# Altium PCB PCB2.PcbDoc
Units mil, origin at the board's own origin, x right, y up, seen from the top; angles counter-clockwise.
Board outline 1210 x 745 mil, 2 copper layers (Top Layer, Bottom Layer); 14 components, 17 nets, 80 pads, 0 vias.
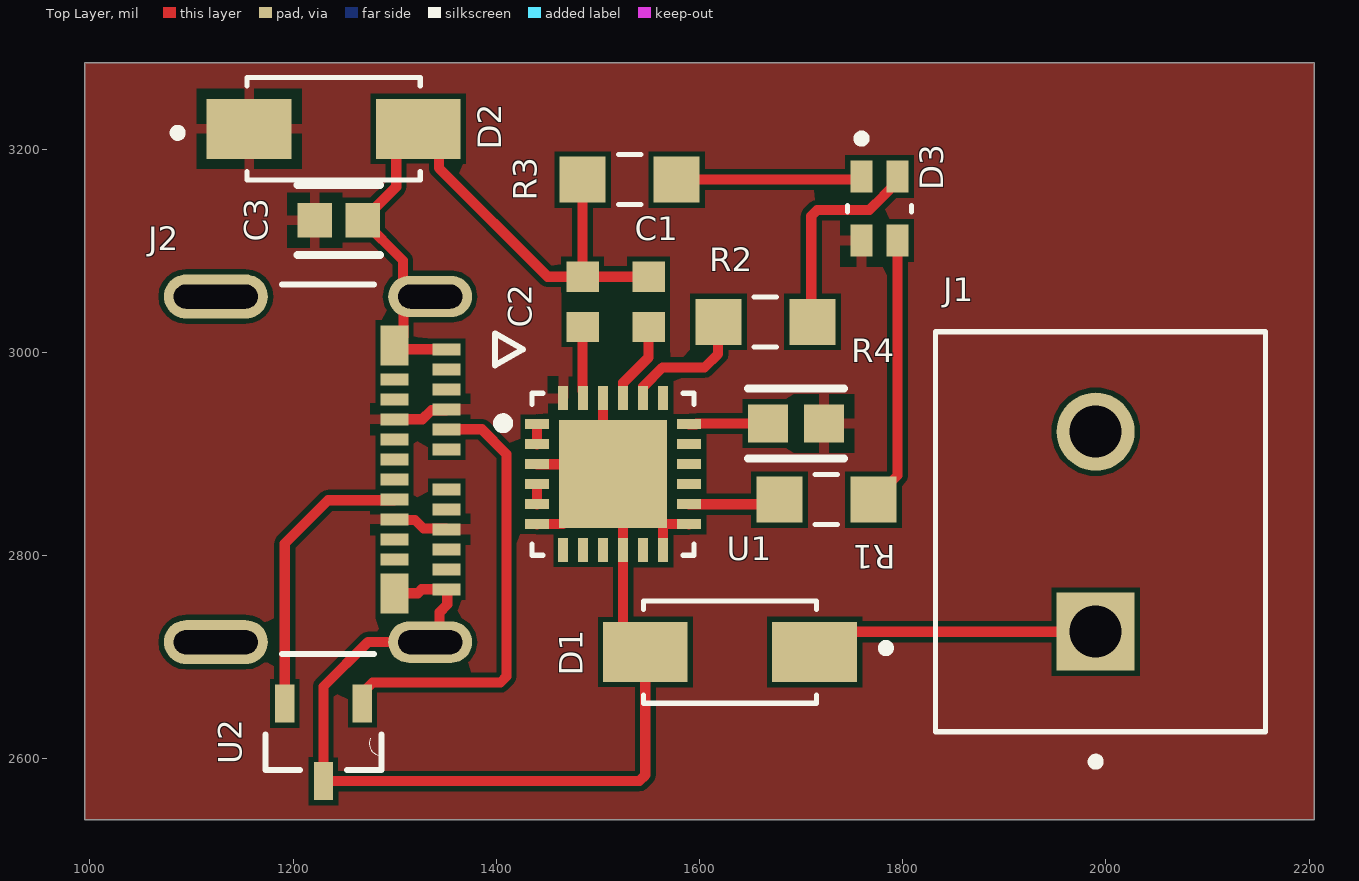
[diagram p0: Top Layer view]
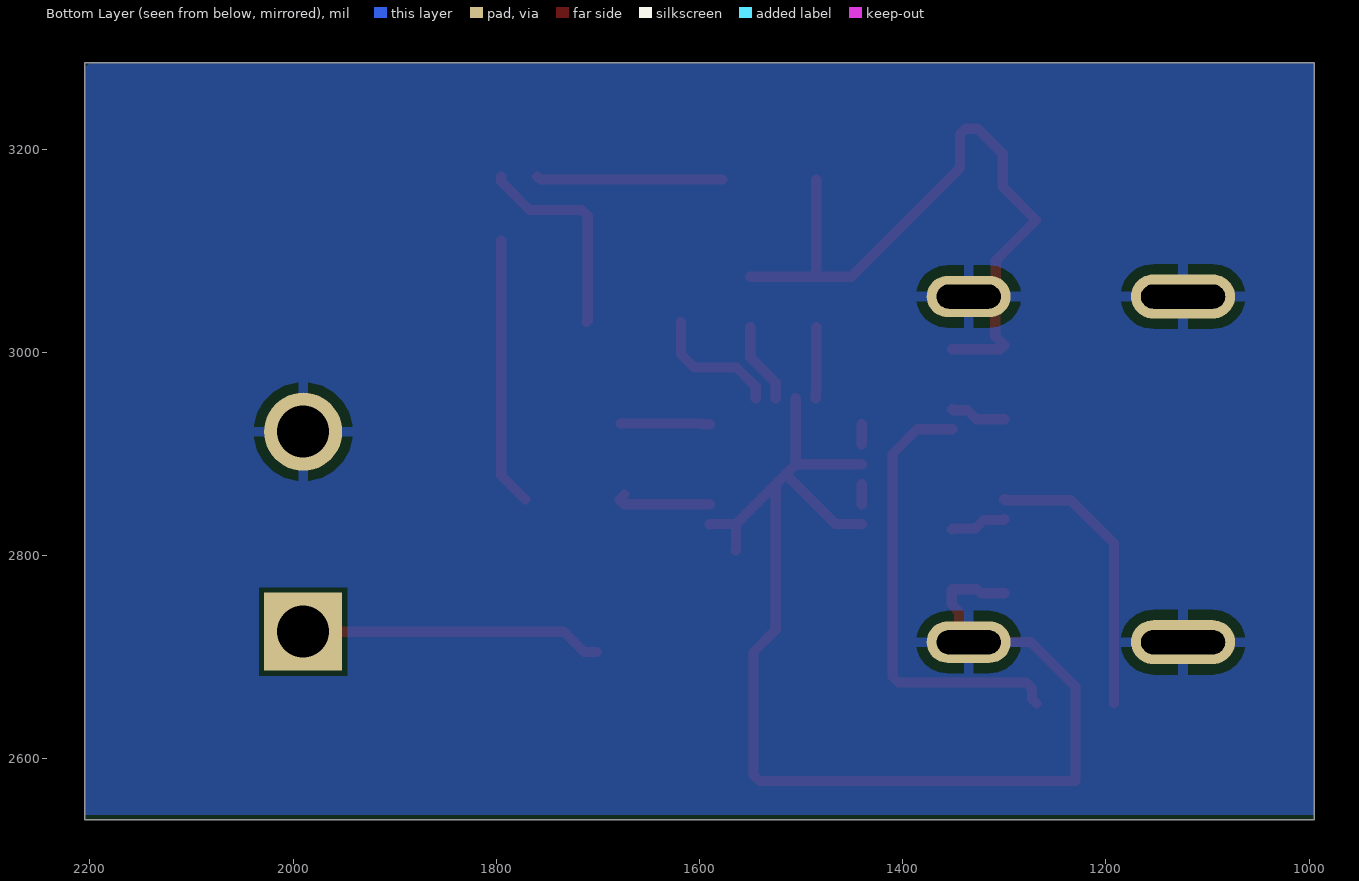
[diagram p1: Bottom Layer view, seen from below]

## Layer stack, top to bottom
Top Solder: solder mask 0.4, Solder Resist, Dk 3.5
Top Layer: signal copper 1.4
Dielectric 1: dielectric 12.6, FR-4, Dk 4.8
Bottom Layer: signal copper 1.4
Bottom Solder: solder mask 0.4, Solder Resist, Dk 3.5

## Board outline
995,2540 995,3285 2205,3285 2205,2540

## Design rules (kind name [scope] priority, off if disabled: settings)
Clearance [All] p1: gap=5 ignorepadtopadclearanceinfootprint=FALSE
ComponentClearance [All] p1: gap=1 collisioncheckmode=3 verticalgap=100000 showdistances=FALSE
MinimumSolderMaskSliver [All] p1: minsoldermaskwidth=5.91
PolygonConnect [All] p1: connectstyle=Relief reliefconductorwidth=10 reliefentries=4 polygonreliefangle="90 Angle" airgapwidth=10
RoutingVias [All] p1: holewidth=28 width=50 viastyle="Through Hole" minholewidth=28 minwidth=50 maxholewidth=28 maxwidth=50
SolderMaskExpansion [All] p1: expansion=4 istentingtop=FALSE
SupplyNets "Schematic Supply Nets_2" [InNet('VCC')] p1: voltage=0.000
SupplyNets "Schematic Supply Nets_1" [InNet('GND')] p2: voltage=0.000
SupplyNets "Schematic Supply Nets" [InNet('VBUS')] p3: voltage=0.000
Width [All] p1: maxlimit=10 minlimit=10 preferedwidth=10
28 further rules are at their usual default settings.

## Components (designator, comment, footprint, x,y, rotation, side; value= is the part's Value field where it differs from the comment)
C1 "CL10B105KP8NNNC" FP-CL10-IPC_C 1550,3049.68 r90 top
C2 "CL10B105KP8NNNC" FP-CL10-IPC_C 1485,3049.68 r90 top
C3 "GRM188R61E475KE11D" FP-GRM188-0_15-IPC_C 1245,3130 r180 top
D1 "SMAJ22A" DIOM4325X250N 1630,2705 r180 top
D2 "SMAJ22A" DIOM4325X250N 1240,3220 r0 top
D3 "19-237/R6GHBHC-A01/2T" LED_19-237/R6GHBHC-A01/2T 1777.28,3141.5 r270 top
J1 "1935161" PHOENIX_1935161 2157.32,2626.57 r90 top
J2 "1054500101" MOLEX_1054500101 1054.33,2884.84 r270 top
R1 "ERJP06J751V" RES_ERJP06J751V 1725,2855 r180 top value=750
R2 "ERJP06J751V" RES_ERJP06J751V 1665,3030 r180 top value=750
R3 "ERJP06J751V" RES_ERJP06J751V 1531.26,3170 r180 top value=750
R4 "RMCF0603FG1K00" FP-RMCF0603-IPC_B 1695,2930 r0 top
U1 "STUSB4500QTR" FP-QFN-24-EP_4x4-MFG 1515,2880 r0 top
U2 "ESDA25L" SOT-23-3L 1230,2615 r270 top

## Footprints (in the part's own frame and the unit in brackets; to place one, negate y for a bottom-side part, rotate by r counter-clockwise, add the part's x,y. Pads: shape width x height; smd on the part's side, far side on the other; paste and mask are expansions set on the pad)
DIOM4325X250N [mm]
  rect 2.12x1.5 smd: A(2.115,0) C(-2.115,0)
  silkscreen extent -4,-1.28 2.16,1.28, body extent -2.57,-1.28 2.57,1.28, height 2.5
FP-CL10-IPC_C [mil]
  rect 29.85x31.97 smd paste+0 mask+0: 1(-24.68,0) 2(24.68,0)
  body extent -44,-22 44,22, height 10
FP-GRM188-0_15-IPC_C [mil]
  rect 33.71x33.79 smd paste+0 mask+0: 1(-23.66,0) 2(23.66,0)
  silkscreen extent -41,-34 41,34
FP-QFN-24-EP_4x4-MFG [mm]
  rect 0.6x0.25 smd paste+0 mask+0: 1(-1.9,1.25) 2(-1.9,0.75) 3(-1.9,0.25) 4(-1.9,-0.25) 5(-1.9,-0.75) 6(-1.9,-1.25) 13(1.9,-1.25) 14(1.9,-0.75) 15(1.9,-0.25) 16(1.9,0.25) 17(1.9,0.75) 18(1.9,1.25)
  rect 0.25x0.6 smd paste+0 mask+0: 7(-1.25,-1.9) 8(-0.75,-1.9) 9(-0.25,-1.9) 10(0.25,-1.9) 11(0.75,-1.9) 12(1.25,-1.9) 19(1.25,1.9) 20(0.75,1.9) 21(0.25,1.9) 22(-0.25,1.9) 23(-0.75,1.9) 24(-1.25,1.9)
  rect 2.7x2.7 smd paste+0 mask+0: 25(0,0)
  silkscreen extent -2.87,-2.02 2.02,2.02, body extent -2.3,-2.3 2.3,2.3, height 0.25
FP-RMCF0603-IPC_B [mil]
  rect 39.61x37.73 smd paste+0 mask+0: 1(-27.6,0) 2(27.6,0)
  silkscreen extent -47,-35 47,35, body extent -57,-29 57,29, height 10
LED_19-237/R6GHBHC-A01/2T [mm]
  rect 0.8x0.55 smd mask+0.05: 1(-0.8,-0.45) 2(-0.8,0.45) 3(0.8,0.45) 4(0.8,-0.45)
  silkscreen extent -1.85,-0.8 0.08,0.8
MOLEX_1054500101 [mm]
  rect 0.298x0.7 smd mask+0: A1(-3,7.54) A2(-2.5,7.54) A3(-2,7.54) A4(-1.5,7.54) A5(-1,7.54) A6(-0.5,7.54) A7(0.5,7.54) A8(1,7.54) A9(1.5,7.54) A10(2,7.54) A11(2.5,7.54) A12(3,7.54) B2(2.25,6.24) B3(1.75,6.24) B4(1.25,6.24) B5(0.75,6.24) B6(0.25,6.24) B7(-0.25,6.24) B8(-0.75,6.24) B9(-1.25,6.24) B10(-1.75,6.24) B11(-2.25,6.24)
  rect 0.998x0.7 smd mask+0: B1(3.1,6.24) B12(-3.1,6.24)
  oval 1.036x2.1 hole 0.6 slot 1.6 at 90 deg mask+0: SH1(-4.32,7.13) SH2(4.32,7.13)
  oval 1.1x2.6 hole 0.6 slot 2.1 at 90 deg mask+0.064: SH3(-4.32,1.77) SH4(4.32,1.77)
  silkscreen extent -4.62,3.42 4.62,9.45
PHOENIX_1935161 [mm]
  rect 1.95x1.95 / inner round 1.95 / far side rect 1.95x1.95 hole 1.3: 1(2.5,4.25)
  round 1.95 hole 1.3: 2(7.5,4.25)
  silkscreen extent -0.85,0 10,8.25
RES_ERJP06J751V [mm]
  rect 1.15x1.15 smd: 1(-1.175,0) 2(1.175,0)
  silkscreen extent -0.28,-0.63 0.28,0.63
SOT-23-3L [mm]
  rect 0.95x0.48 smd: 1(-1,0.97) 2(-1,-0.97) 3(0.94,0)
  silkscreen extent -0.23,-1.45 0.66,1.45

## Part data
C1 C2: library part CMP-2000-06094-2, "Cap Ceramic 1uF 10V X7R ±10% Pad SMD 0603 +125°C T/R", Capacitance=1uF, Case Code (Imperial)=0603, Case Code (Metric)=1608, Dielectric=X7R, Max Operating Temperature=125°C, Min Operating Temperature=-55°C, Package Quantity=1, Tolerance=10%, Voltage Rating=10V, Case/Package=0603, Contact Plating=Tin, Depth=0.8mm, Height=0.8mm, Lead Free="Lead Free", Length=1.6mm, Mount="Surface Mount", Packaging="Tape and Reel", Radiation Hardening=No, Thickness=0.035inch, Voltage Rating (DC)=10V, Width=0.031inch
C3: library part CMP-2006-02523-2, "Chip Multilayer Ceramic Capacitors for General Purpose, 0603, 4.7uF, X5R, 15%, 10%, 25V", Capacitance=4.7uF, Case Code (Imperial)=0603, Case Code (Metric)=1608, Dielectric=X5R, Max Operating Temperature=85°C, Min Operating Temperature=-55°C, Package Quantity=4000, Tolerance=10%, Voltage=25V, Case/Package=0603, Depth=0.8mm, Height=0.8mm, Lead Free="Lead Free", Length=1.6mm, Material=Ceramic, Mount="Surface Mount", Packaging="Cut Tape", REACH SVHC="No SVHC", Thickness=0.031inch, Voltage Rating=25V, Voltage Rating (DC)=25V, Width=0.031inch
D1 D2: "SMAJ Series 35.5 V 0.4 kW Surface Mount Uni-Directional TVS Diode - DO-214AC", Package="DO-214 Littelfuse", Availability="In Stock", Check_prices=https://www.snapeda.com/parts/SMAJ22A/Littelfuse/view-part/?ref=eda, MF=Littelfuse, MP=SMAJ22A, Price=None, Purchase-URL=https://pricing.snapeda.com/search/part/SMAJ22A/?ref=eda, SnapEDA_Link=https://www.snapeda.com/parts/SMAJ22A/Littelfuse/view-part/?ref=snap
D3: "Red, Green, Blue (RGB) 624nm Red, 525nm Green, 470nm Blue LED Indication - Discrete 2V Red, 3.3V Green, 3.3V Blue 2-SMD, No Lead", Package="SMD-2 Everlight Electronics", Availability="In Stock", Check_prices=https://www.snapeda.com/parts/19-237/R6GHBHC-A01/2T/Everlight+Electronics+Co+Ltd/view-part/?ref=eda, MF="Everlight Electronics", MP=19-237/R6GHBHC-A01/2T, Price=None, Purchase-URL=https://pricing.snapeda.com/search/part/19-237/R6GHBHC-A01/2T/?ref=eda, SnapEDA_Link=https://www.snapeda.com/parts/19-237/R6GHBHC-A01/2T/Everlight+Electronics+Co+Ltd/view-part/?ref=snap
J1 R1 R2 R3: Package=None, Availability=Unavailable, Price=None
  J1: MF="{'manufacturer': u'Phoenix Contact'}", MP=1935161
  R1 R2 R3: MP=ERJP06J751V
J2: "USB-C (USB TYPE-C) USB 3.2 Gen 2 (USB 3.1 Gen 2, Superspeed + (USB 3.1)) Receptacle Connector 24 Position Surface Mount, Right Angle; Through Hole", Package=None, Check_prices=https://www.snapeda.com/parts/1054500101/Molex/view-part/?ref=eda, MF=Molex, MP=1054500101, SnapEDA_Link=https://www.snapeda.com/parts/1054500101/Molex/view-part/?ref=snap
R4: library part CMP-26527-003160-1, "1kΩ ±1% 0.1W 0603 Thick Film Chip Resistor AEC-Q200 compliant", Case Code (Imperial)=0603, Case Code (Metric)=1608, Max Operating Temperature=155°C, Max Power Dissipation=100mW, Min Operating Temperature=-55°C, Resistance=1kR, Resistor Type="Thick Film", Temperature Coefficient=100ppm/°C, Tolerance=1%, Case/Package=0603, Contact Plating=Tin, Features="Automotive AEC-Q200", Height=0.022inch, Lead Free="Lead Free", Length=0.061inch, Mount="Surface Mount", Number of Terminations=2, Packaging="Tape and Reel", Radiation Hardening=No, RoHS Compliant=Yes, Series=RMCF, Width=0.031inch
U1: library part CMP-12113-000003-3, "4.1V~22V USB 2.0 I2C Controllers Interface ICs STUSB45 Controller 24-VFQFN Exposed Pad", Ambient Temperature Range High=105°C, Max Junction Temperature (Tj)=145°C, Max Supply Voltage=22V, Min Operating Temperature=-40°C, Min Supply Voltage=3V, Height=1mm, Interface="I2C, USB", Lifecycle Status=Production, Max Operating Temperature=105°C, Number of Ports=1, Schedule B="8542390000, 8542390000", USB Standard="USB 2.0"
U2: "- Clamp - Ipp Tvs Diode Surface Mount SOT-23-3", Package="SOT-23-3 STMicroelectronics", Availability="In Stock", Check_prices=https://www.snapeda.com/parts/ESDA25L/STMicroelectronics/view-part/?ref=eda, MF=STMicroelectronics, MP=ESDA25L, Price=None, Purchase-URL=https://pricing.snapeda.com/search?q=ESDA25L&ref=eda, SnapEDA_Link=https://www.snapeda.com/parts/ESDA25L/STMicroelectronics/view-part/?ref=snap

## Nets (pads, with @x,y where several pads share a name; then routed paths per layer and width w, separated by ;. In a path a pad name is that pad's centre, name@x,y a point inside that pad or via, vN(x,y) a via of type N, cw(c..) or ccw(c..) an arc to the next point about the centre after c; other vN are vias at no path point)
GND: C1.2 C2.2 C3.1 D1.A D2.A J1.2 J2.A1 J2.A12 J2.B1 J2.B12 J2.SH1 J2.SH2 J2.SH3 J2.SH4 R3.2 U1.3 U1.6 U1.10 U1.12 U1.13 U1.22 U1.25 U2.3 | length 2015.4
  Top Layer w10: C3.1 1308.31,3090.31 J2.SH1@1308.31,3069.14 ; C3.1 1301.54,3162.91 1301.54,3195.47 1326.06,3220 1338.27,3220 1343.67,3214.6 1343.67,3181.33 1450.63,3074.37 C2.2 ; J2.B1 1300.13,2762.92 1322.92,2762.92 1326.73,2766.73 J2.A12 1351.72,2766.19 1351.72,2751.72 1344.3,2744.3 1344.3,2724.02 J2.SH2 1273.67,2714.76 1230,2671.1 U2.3 1540.87,2577.99 1546.73,2583.85 D1.A 1524.84,2726.89 U1.10 U1.25@1524.84,2870.16 ; J2.SH1 1323,3054.92 1308.78,3040.7 1308.78,3015.67 J2.B12 1303.94,3002.95 J2.A1 ; U1.6 1440.28,2830.87 1465.87,2830.87 U1.25 ; U1.3 U1.25@1505.16,2889.84 ; R3.2 C2.2 ; U1.22 U1.25@1505.16,2889.84 ; C1.2 C2.2 ; U1.12 1564.13,2805.28 U1.25@1564.13,2830.87 ; U1.13 1589.72,2830.87 U1.25@1564.13,2830.87 ; U1.25@1505.16,2889.84 U1.25 ; U1.25 U1.25@1524.84,2870.16 ; U1.25@1524.84,2870.16 U1.25@1564.13,2830.87
NetC1_1: C1.1 U1.21 | length 80.6
  Top Layer w10: U1.21 1524.92,2954.88 1524.92,2970 1550,2995.08 C1.1
NetC2_1: C2.1 U1.23 | length 70.4
  Top Layer w10: C2.1 1485,2962.01 1485.47,2961.54 U1.23
NetD3_1: D3.1 R3.1 | length 183.3
  Top Layer w10: R3.1 1756.57,3170 D3.1
NetD3_2: D3.2 R2.1 | length 208.9
  Top Layer w10: R2.1 1710,3031.26 1710,3134.14 1715.86,3140 1767.29,3140 1781.61,3154.32 1781.61,3154.68 1795,3168.07 D3.2
NetD3_3: D3.3 R1.1 | length 264.8
  Top Layer w10: R1.1 1795,2878.74 D3.3
NetJ2_A5: J2.A5 U2.1 | length 446.8
  Top Layer w10: U2.1 1272.64,2658.82 1272.64,2669.14 1278.5,2675 1404.14,2675 1410,2680.86 1410,2900 1385.79,2924.21 J2.A5
NetJ2_B5: J2.B5 U2.2 | length 283.6
  Top Layer w10: U2.2 1191.81,2811.81 1234.45,2854.45 1299.13,2854.45 J2.B5
NetR1_2: R1.2 U1.14 | length 97.9
  Top Layer w10: U1.14 1674.21,2850.47 R1.2 R1.2@1673.74,2860
NetR2_2: R2.2 U1.20 | length 130.2
  Top Layer w10: U1.20 1544.61,2954.88 1544.61,2966.07 1563.54,2985 1605,2985 1618.22,2998.22 1618.22,3029.48 R2.2
NetR4_1: R4.1 U1.18 | length 87.9
  Top Layer w10: U1.18 1596.54,2929.21 1597.32,2930 R4.1@1677.4,2930
NetU1_1: U1.1 U1.2 | length 19.7
  Top Layer w10: U1.2 U1.1
NetU1_4: U1.4 U1.5 | length 19.7
  Top Layer w10: U1.5 U1.4
SCL: U1.7
SDA: U1.8
VBUS: C3.2 D2.C D3.4 J2.A4 J2.A9 J2.B4 J2.B9 R4.2 U1.24 | length 110.5
  Top Layer w10: J2.B4 1300.74,2834.89 1320.11,2834.89 1328.35,2826.65 1350.31,2826.65 J2.A9 ; J2.B9 1327.24,2934.06 1336.21,2943.03 1350.31,2943.03 J2.A4
VCC: D1.C J1.1 | length 297.2
  Top Layer w10: D1.C@1701.06,2705 D1.C 1733.27,2725 J1.1
pads on no net: J2.A2 J2.A3 J2.A6 J2.A7 J2.A8 J2.A10 J2.A11 J2.B2 J2.B3 J2.B6 J2.B7 J2.B8 J2.B10 J2.B11 U1.9 U1.11 U1.15 U1.16 U1.17 U1.19

## Polygon pours and split planes (outlines as drawn)
GND on Bottom Layer "GND_L02_P000" (solid, pour order 0): 995,2545 2205,2545 2205,3280 2200,3285 995,3285
VBUS on Top Layer "VBUS_L01_P001" (solid, pour order 1): 995,2540 2205,2540 2205,3285 995,3285

## Silkscreen, mask and mechanical layers (free items; w line width, h text height)
Mechanical 1:
  the board outline again, w10
  text "MISSAL FATIMA" at 1835.05,3115 h40